# EAGLE board Actuator_controller (EAGLE 9.6.2)

Size 19.6 x 16.15 mm. Coordinates in mm from the lower left corner, seen from the top.
Outline: 16.3,16.15 0,16.15 0,0 16.3,0 arc-90 19.55,3.23 19.6,3.23 19.6,12.93 19.55,12.93 arc-90 16.3,16.15
Copper layers (1*16): Top 0.035mm / dielectric 1.5mm / Bottom 0.035mm
Design rules "default": minimum track width 6mil, minimum drill 0.35mm, track to track 6mil, track to pad 6mil, pad to pad 6mil, via to via 6mil, smd to smd 6mil, copper to edge 40mil, drill to drill 6mil, minimum pad ring 10mil, minimum via ring 8mil, stop-mask expansion 4mil, vias tented up to drill 0mil, thermal gap 10mil

## Footprints (pad centres in the part's own frame; a part is rotated, then mirrored left to right if it is on the bottom)
SOP64P600X175-16N = smd 1.968 x 0.41: 1 -2.473,2.24; 2 -2.473,1.6; 3 -2.473,0.96; 4 -2.473,0.32; 5 -2.473,-0.32; 6 -2.473,-0.96; 7 -2.473,-1.6; 8 -2.473,-2.24; 9 2.473,-2.24; 10 2.473,-1.6; 11 2.473,-0.96; 12 2.473,-0.32; 13 2.473,0.32; 14 2.473,0.96; 15 2.473,1.6; 16 2.473,2.24
SOT65P210X110-6N = smd 0.969 x 0.397: 1 -0.971,0.65; 2 -0.971,0; 3 -0.971,-0.65; 4 0.971,-0.65; 5 0.971,0; 6 0.971,0.65
SOIC127P1032X265-20N = smd 2.052 x 0.602: 1 -4.654,5.715; 2 -4.654,4.445; 3 -4.654,3.175; 4 -4.654,1.905; 5 -4.654,0.635; 6 -4.654,-0.635; 7 -4.654,-1.905; 8 -4.654,-3.175; 9 -4.654,-4.445; 10 -4.654,-5.715; 11 4.654,-5.715; 12 4.654,-4.445; 13 4.654,-3.175; 14 4.654,-1.905; 15 4.654,-0.635; 16 4.654,0.635; 17 4.654,1.905; 18 4.654,3.175; 19 4.654,4.445; 20 4.654,5.715

## Placement (x,y rotation side)
U$1  [SOP64P600X175-16N]  3.62,8.12 90 bottom
U$2  [SOT65P210X110-6N]  8.62,7.97 0 bottom
U$3  [SOIC127P1032X265-20N]  9.62,8.12 90 top

## Library data of the parts
U$1 = AA51880
U$2 = MCP4017
U$3 = l293d

## Nets
N$1: U$2.6
POT: U$1.15